# Altium PCB SWDM-21DD8_LV_XX_V1.PcbDoc (part 1 of 2)
Units mil, origin at the board's own origin, x right, y up, seen from the top; angles counter-clockwise.
Board outline 3898.56 x 2933.86 mil, 2 copper layers (Top, Bottom), stack 12.7 mil thick; 138 components, 69 nets, 322 pads, 492 vias.
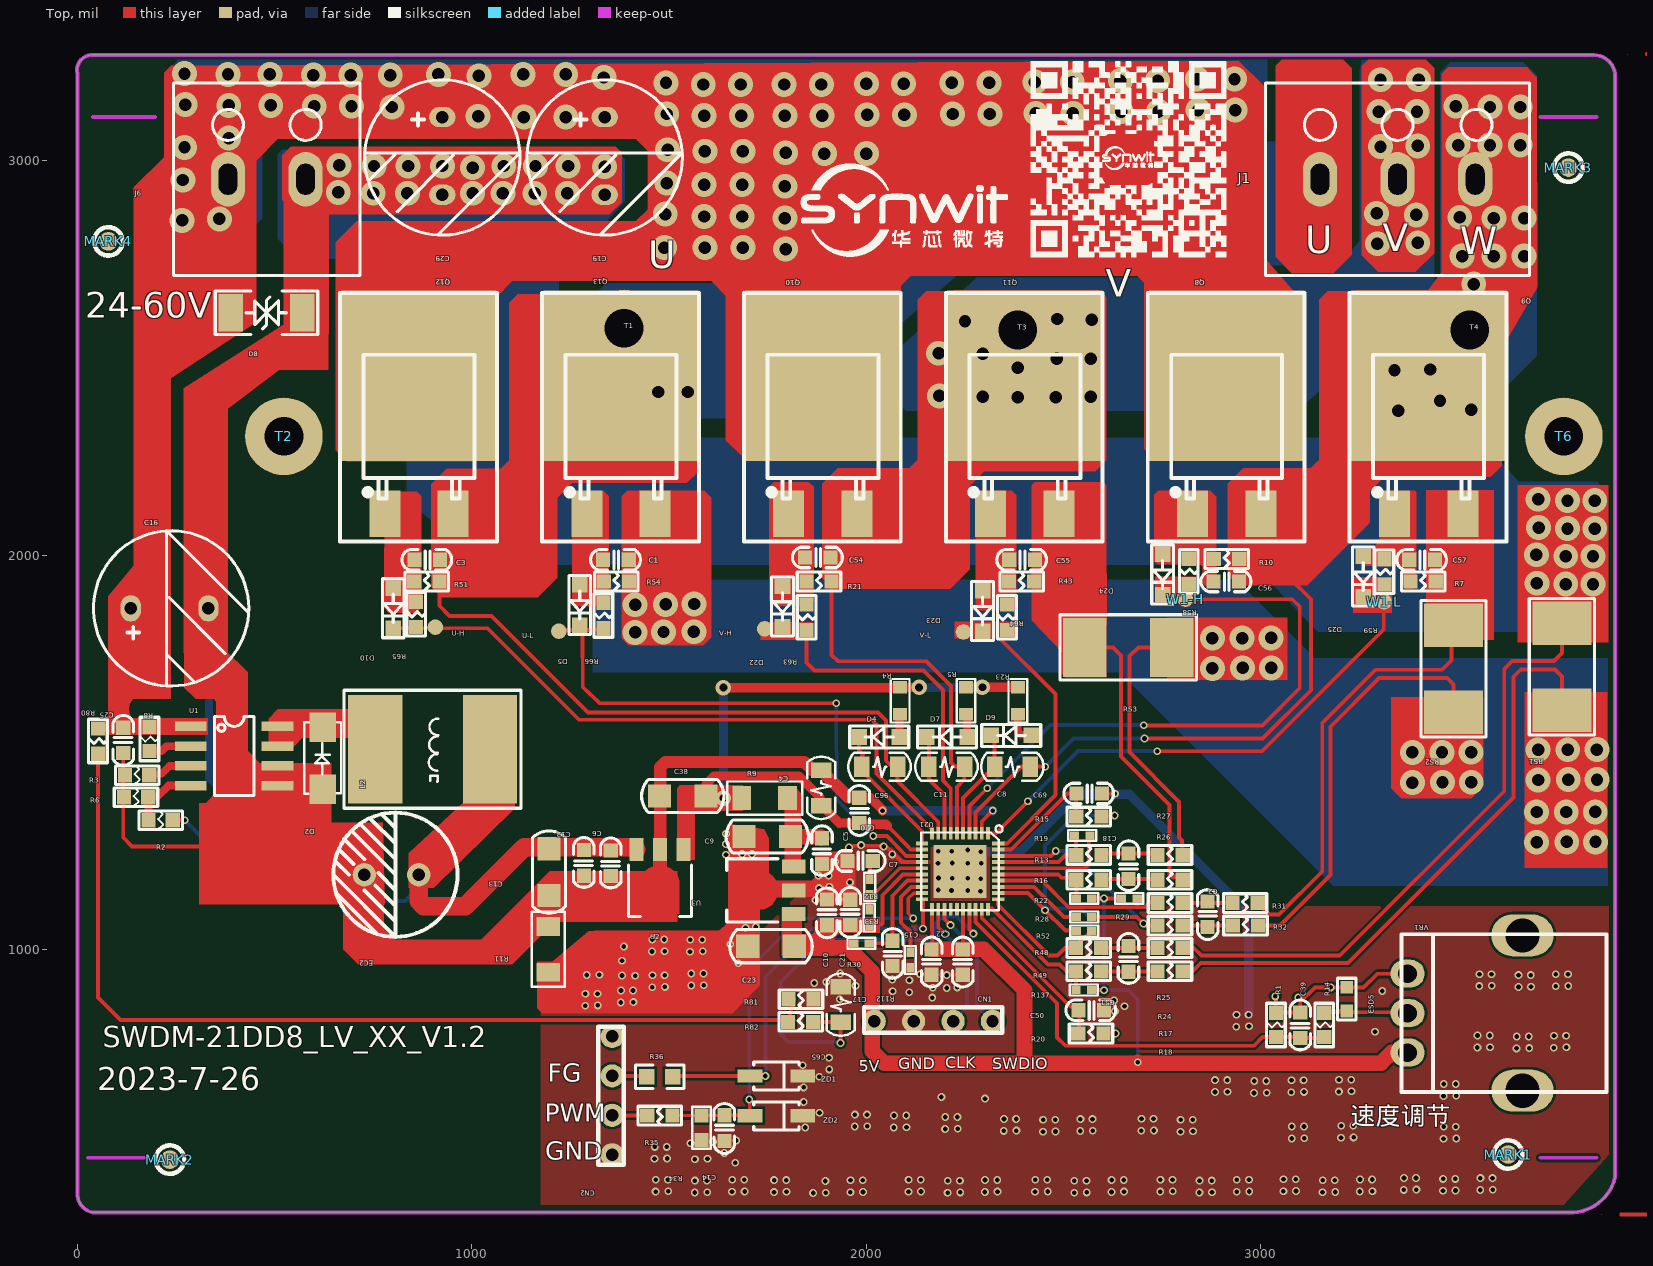
[diagram p0: Top view]
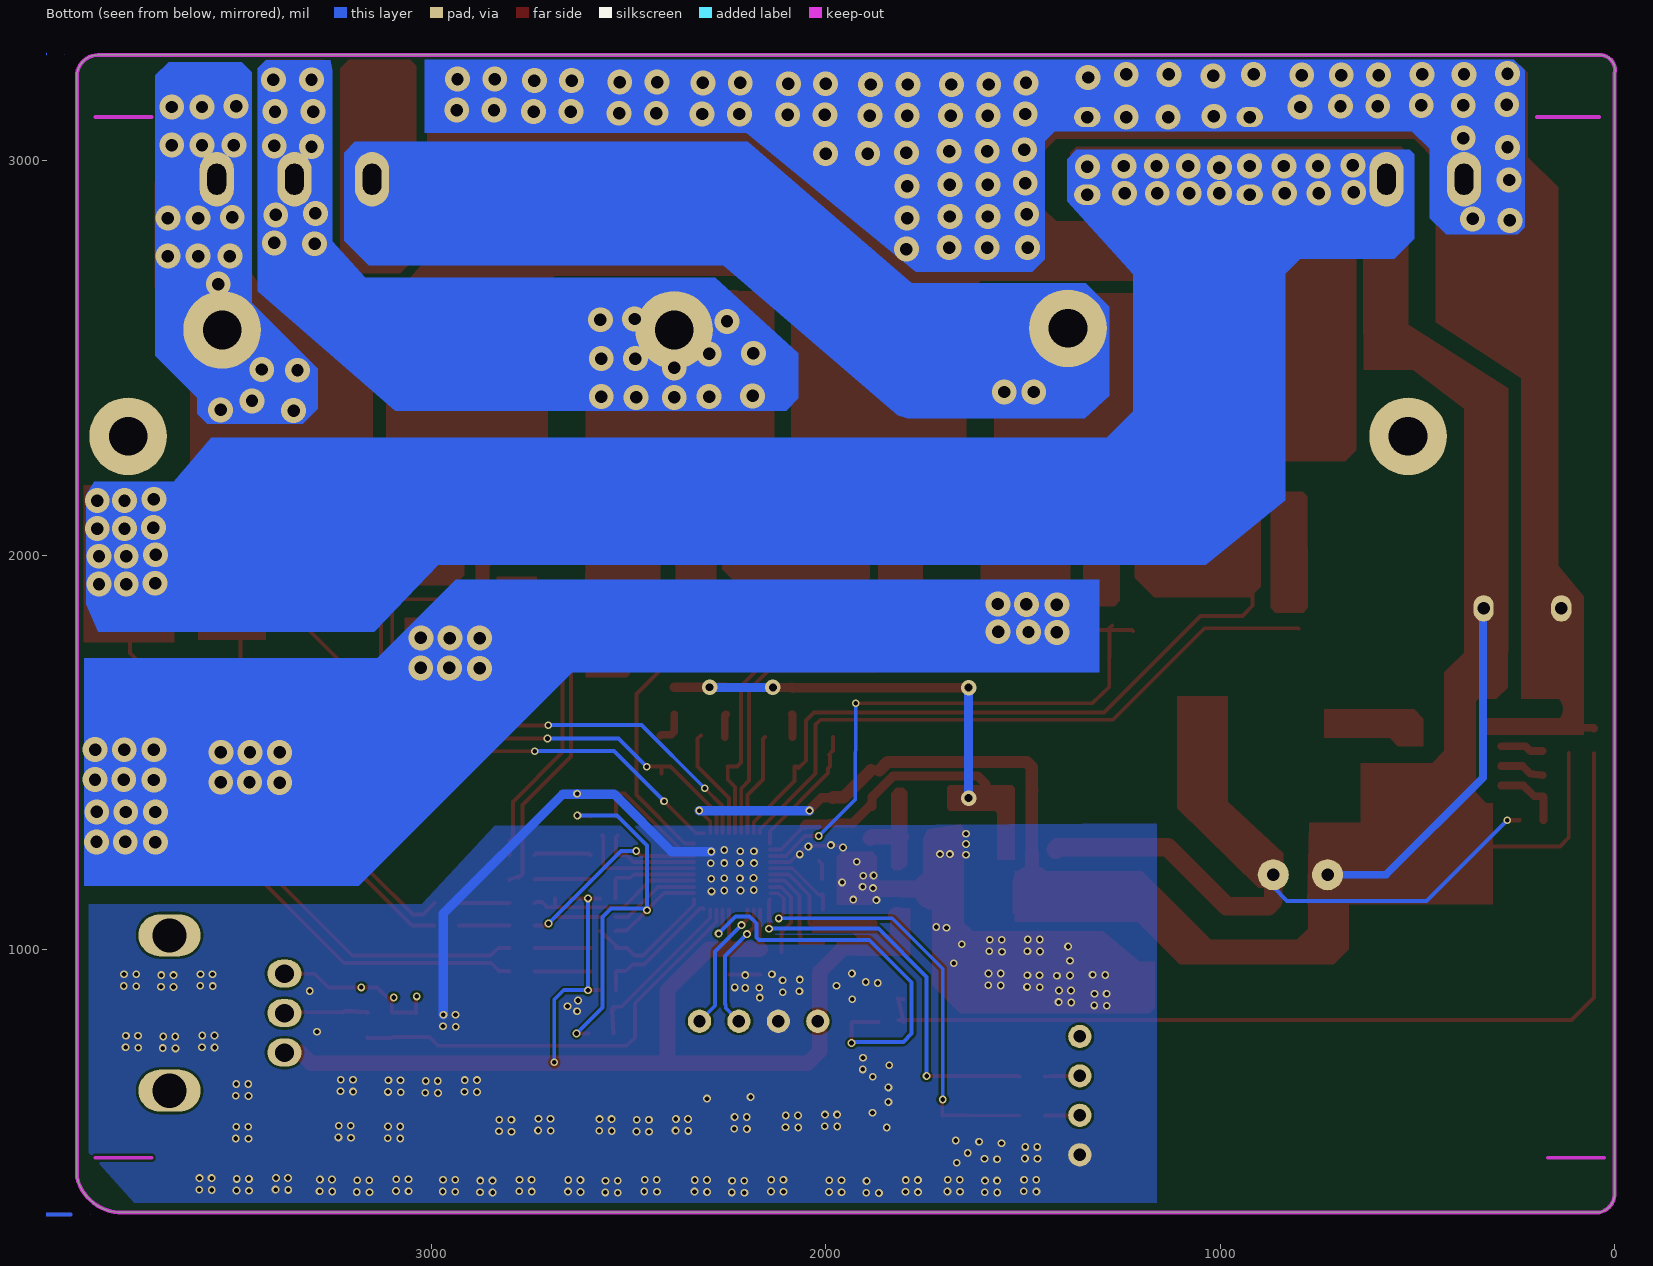
[diagram p1: Bottom view, seen from below]

## Layer stack, top to bottom
Solder Mask Top: solder mask 0.4, Solder Resist, Dk 3.5
Top: signal copper 1.35
Dielectric 1: dielectric 10, FR-4, Dk 4.3
Bottom: signal copper 1.35
Solder Mask Bottom: solder mask 0.4, Solder Resist, Dk 3.5

## Board outline
0,383.86 0,383.83 ccw(c48.6,381.62) 39.37,333.86 3792.99,333.86 ccw(c3784.46,449.99) 3897.64,422.59 3897.64,3220.47 3897.63,3220.5 ccw(c3843.5,3213.09) 3844.49,3267.72 39.37,3267.72 ccw(c37.62,3229.15) 0,3220.47

## Design rules (kind name [scope] priority, off if disabled: settings)
Clearance "Clearance - Default - DEFAULT- SMD" [IsVia vs IsSMTPin] p1: gap=6 ignorepadtopadclearanceinfootprint=FALSE
Clearance "Clearance - Default - DEFAULT - Via" [IsVia vs IsVia] p2: gap=6 ignorepadtopadclearanceinfootprint=FALSE
Clearance "Clearance - Default - DEFAULT - Net" [All] p3: gap=5.91 ignorepadtopadclearanceinfootprint=FALSE except(0: Arc-Hole Track-Hole SMDPad-Hole THPad-Hole Via-Hole Fill-Hole Poly-Hole Region-Hole Text-Hole; 10: Text-Text)
ComponentClearance "ComponentClearance - Default - DEFAULT" [All] p1: gap=5.91 collisioncheckmode=3 verticalgap=10 showdistances=FALSE
FanoutControl Fanout_Small [(CompPinCount < 5)] p3: bgadir=Out bgaviamode=Centered fanoutstyle=Auto fanoutdirection=OutThenIn viagrid=1 // Fanout_Small (Default Rule)
FanoutControl Fanout_SOIC [IsSOIC] p4: bgadir=Out bgaviamode=Centered fanoutstyle=Auto fanoutdirection=Alternating viagrid=1 // Fanout_SOIC (Default Rule)
HoleToHoleClearance "HoleToHoleClearance - Default - DEFAULT" [All] p1: gap=5.91 allowstackedmicrovias=TRUE
Length "Default Length" [All] p1: maxlimit=50000 minlimit=0
MaxMinImpedance "Default Impedance" [All] p1: minimum=50.00 maximum=150.0
ParallelSegment "Default Parallel Segment Adjasent" [All] p1: limit=1000 gap=200
ParallelSegment "Default Parallel Segment Same Layer" [All] p2: limit=1000 gap=200
PlaneConnect "Default PlaneConnect" [All] p1: planeconnectstyle=Direct reliefexpansion=20 reliefentries=4 reliefconductorwidth=15 reliefairgap=10
PolygonConnect "PolygonConnect - Default SMT" [IsSMTPin] p1: connectstyle=Direct reliefconductorwidth=10 reliefentries=4 polygonreliefangle="45 Angle" airgapwidth=10
PolygonConnect "PolygonConnect - Default Pad" [All] p2: connectstyle=Direct reliefconductorwidth=15 reliefentries=4 polygonreliefangle="45 Angle" airgapwidth=10
RoutingLayers "RoutingLayers - Default - DEFAULT" [All] p1: top layer_v5=TRUE bottom layer_v5=TRUE
RoutingPriority "RoutingPriority - Default - DEFAULT" [All] p1: routingpriority=3
RoutingTopology "Default Routing Topology" [All] p1: topology=Shortest
RoutingVias "RoutingVias - Default - DEFAULT" [All] p1: holewidth=11.81 width=19.68 viastyle="Through Hole" minholewidth=11.81 minwidth=19.68 maxholewidth=11.81 maxwidth=19.68
SMDToCorner "SMDToCorner - Default - DEFAULT" [All] p1: distance=60000
SolderMaskExpansion [All] p1: expansion=4 istentingtop=FALSE
Width "Default Width" [All] p1: maxlimit=118.11 minlimit=6 preferedwidth=9.84
22 further rules are at their usual default settings.

## Components (designator, comment, footprint, x,y, rotation, side; value= is the part's Value field where it differs from the comment)
C1 "C0603" C0603 1364.17,1988.19 r180 top (schematic designator R48)
C2 "C0603" C0603 2864.96,1088.98 r270 top (schematic designator C18)
C3 "C0603" C0603 885.83,1988.19 r180 top (schematic designator C25)
C4 "C0805" C0805 1885.43,1409.45 r270 top (schematic designator R36)
C5 "C0603" C0603 1887.4,1250.79 r90 top (schematic designator C38)
C6 "C0603" C0603 1351.97,1219.69 r90 top (schematic designator C55)
C7 "C0603A" C0603A 1984.25,1224.8 r0 top (schematic designator C6)
C8 "C0805" C0805 2370.47,1463.78 r0 top (schematic designator C65)
C9 "C1206" C1206 1748.82,1286.61 r180 top (schematic designator C69)
C10 "C0603" C0603 1900,1093.31 r270 top (schematic designator R82)
C11 "C0805" C0805 2203.54,1463.78 r0 top (schematic designator C1)
C12 "C0603" C0603 1283.86,1220.87 r90 top (schematic designator C10)
C13 "C1206" C1206 1195.67,1196.46 r90 top (schematic designator C11)
C14 "C0603" C0603 1640.16,546.85 r270 top (schematic designator C12)
C15 "C0603A" C0603A 2165.35,968.5 r90 top (schematic designator C13)
C16 "CAP_10X12" CAP_10X12 135.43,1864.96 r0 top (schematic designator C14)
C17 "C0603A" C0603A 2066.54,990.55 r270 top (schematic designator C15)
C18 "C0603" C0603 2664.57,1212.6 r90 top (schematic designator C16)
C19 "CAP_10X12" CAP_10X12 1336.61,3110.24 r270 top (schematic designator C17)
C20 "C0603A" C0603A 1981.89,1352.76 r270 top (schematic designator C19)
C21 "C0603A" C0603A 1959.06,1094.49 r90 top (schematic designator C2)
C22 "C0603A" C0603A 2244.09,968.5 r90 top (schematic designator C20)
C23 "C1206" C1206 1758.27,1008.66 r180 top (schematic designator C21)
C25 "C0603A" C0603A 116.54,1530.31 r90 top (schematic designator C22)
C29 "CAP_10X12" CAP_10X12 925.2,3110.24 r270 top (schematic designator C23)
C38 "C1206" C1206 1534.65,1389.37 r0 top (schematic designator C29)
C39 "C0603" C0603 3099.61,809.06 r90 top (schematic designator C3)
C50 "C0603" C0603 2568.9,846.46 r180 top (schematic designator C39)
C51 "C0603" C0603 2664.57,977.56 r90 top (schematic designator C4)
C54 "C0603" C0603 1875.98,1994.09 r180 top (schematic designator C5)
C55 "C0603" C0603 2393.7,1988.19 r180 top (schematic designator C50)
C56 "C0603" C0603 2911.42,1933.07 r180 top (schematic designator C51)
C57 "C0603" C0603 3407.48,1988.19 r180 top (schematic designator C54)
C65 "C0805" C0805 1935.04,861.02 r90 top (schematic designator C56)
C69 "C0603" C0603 2563.78,1395.67 r180 top (schematic designator C57)
C96 "C0805" C0805 2033.86,1463.78 r0 top (schematic designator C7)
CN1 "4P-2.54-8" 4P-2.54-8 2019.68,818.5 r0 top (schematic designator C8)
CN2 "4P-2.54-8" 4P-2.54-8 1355.51,479.92 r90 top (schematic designator C9)
D2 "SMA" SMA 621.65,1485.43 r90 top (schematic designator CN1)
D4 "SOD-323" SOD-323 2032.68,1538.98 r0 top (schematic designator D23)
D5 "SOD-323" SOD-323 1273.62,1873.23 r90 top (schematic designator D24)
D7 "SOD-323" SOD-323 2204.72,1538.98 r0 top (schematic designator D25)
D8 "Y_SMA-TVS" Y_SMA-TVS 479.53,2614.17 r0 top (schematic designator D4)
D9 "SOD-323" SOD-323 2367.32,1542.91 r0 top (schematic designator D5)
D10 "SOD-323" SOD-323 800.79,1865.35 r90 top (schematic designator C96)
D22 "SOD-323" SOD-323 1787.4,1870.08 r90 top (schematic designator CN2)
D23 "SOD-323" SOD-323 2294.49,1858.27 r90 top (schematic designator D10)
D24 "SOD-323" SOD-323 2750.79,1950.79 r90 top (schematic designator D2)
D25 "SOD-323" SOD-323 3259.45,1945.67 r90 top (schematic designator D22)
EC2 "EC8D-1" EC8D-1 865.35,1189.76 r270 top (schematic designator D7)
ESD5 "ESD0603" ESD0603 3217.72,874.41 r90 top (schematic designator D8)
J1 "3P-5.08" 3P-5.08 3248.03,2952.76 r0 top (schematic designator D9)
J6 "2P-5.08" 2P-5.08 480.32,2952.76 r0 top (schematic designator EC2)
L2 "L-8050" L-8050 900.39,1507.87 r90 top (schematic designator ESD5)
MARK1 "CN3.0" CN3.0 3626.77,480.71 r0 top (schematic designator J1)
MARK2 "CN3.0" CN3.0 234.65,467.72 r0 top (schematic designator J6)
MARK3 "CN3.0" CN3.0 3779.53,2982.28 r0 top (schematic designator L2)
MARK4 "CN3.0" CN3.0 78.74,2795.28 r0 top (schematic designator MARK1)
Q8 "TO-252-2-180" TO-252-2-180 2913.39,2084.65 r90 top (schematic designator Q11)
Q9 "TO-252-2-180" TO-252-2-180 3425.2,2084.65 r90 top (schematic designator Q12)
Q10 "TO-252-2-180" TO-252-2-180 1889.76,2084.65 r90 top (schematic designator MARK2)
Q11 "TO-252-2-180" TO-252-2-180 2401.57,2084.65 r90 top (schematic designator MARK3)
Q12 "TO-252-2-180" TO-252-2-180 866.14,2084.65 r90 top (schematic designator MARK4)
Q13 "TO-252-2-180" TO-252-2-180 1377.95,2084.65 r90 top (schematic designator Q10)
R1 "R0603" R0603 3038.19,809.06 r90 top (schematic designator Q13)
R2 "R0603" R0603 211.02,1327.95 r180 top (schematic designator R17)
R3 "R0603" R0603 151.57,1442.13 r180 top (schematic designator R27)
R4 "0603-R" 0603-R 2085.83,1665.35 r270 top (schematic designator R34)
R5 "0603-R" 0603-R 2252.76,1665.35 r270 top (schematic designator R49)
R6 "R0603" R0603 148.82,1386.22 r180 top (schematic designator R59)
R7 "R0603A$2F$3" R0603A$2F$3 3411.42,1933.07 r180 top (schematic designator R66)
R8 "R0603" R0603 182.68,1533.86 r90 top (schematic designator R7)
R9 "R1206" R1206 1742.13,1384.25 r0 top
R10 "R0603A$2F$3" R0603A$2F$3 2913.39,1990.16 r180 top (schematic designator Q8)
R11 "R1206" R1206 1193.7,1000.79 r270 top (schematic designator Q9)
R12 "0402" 0402 2008.66,1159.06 r270 top (schematic designator R10)
R13 "R0603A$2F$3" R0603A$2F$3 2563.78,1240.16 r180 top (schematic designator R11)
R14 "R0603" R0603 3160.63,809.06 r90 top (schematic designator R12)
R15 "R0603A$2F$3" R0603A$2F$3 2563.78,1337.4 r180 top (schematic designator R13)
R16 "R0603A$2F$3" R0603A$2F$3 2563.78,1177.17 r180 top (schematic designator R137)
R17 "R0603A$2F$3" R0603A$2F$3 2769.68,1003.94 r180 top (schematic designator R14)
R18 "R0603A$2F$3" R0603A$2F$3 2769.68,944.88 r180 top (schematic designator R15)
R19 "0402" 0402 2547.24,1289.37 r180 top (schematic designator R16)
R20 "R0603A$2F$3" R0603A$2F$3 2569.29,787.4 r180 top (schematic designator R18)
R21 "R0603A$2F$3" R0603A$2F$3 1879.92,1933.07 r180 top (schematic designator R19)
R22 "0402" 0402 2551.97,1129.92 r0 top (schematic designator R2)
R23 "0603-R" 0603-R 2383.86,1665.35 r270 top (schematic designator R20)
R24 "R0603A$2F$3" R0603A$2F$3 2769.68,1061.02 r180 top (schematic designator R21)
R25 "R0603A$2F$3" R0603A$2F$3 2769.68,1118.11 r180 top (schematic designator R22)
R26 "R0603A$2F$3" R0603A$2F$3 2769.68,1177.17 r180 top (schematic designator R23)
R27 "R0603A$2F$3" R0603A$2F$3 2769.68,1240.16 r180 top (schematic designator R24)
R28 "0402" 0402 2551.97,1082.68 r0 top (schematic designator R25)
R29 "0402" 0402 2666.54,1129.92 r180 top (schematic designator R26)
R30 "0402" 0402 1987.4,1016.14 r0 top (schematic designator R28)
R31 "R0603A$2F$3" R0603A$2F$3 2959.84,1118.11 r180 top (schematic designator R29)
R32 "R0603A$2F$3" R0603A$2F$3 2961.02,1061.02 r180 top (schematic designator R3)
R33 "0402" 0402 2007.09,1081.5 r90 top (schematic designator R30)
R34 "2512R-X" 2512R-X 1581.89,548.43 r270 top (schematic designator R31)
R35 "R0603A" R0603A 1476.38,579.53 r0 top (schematic designator R32)
R36 "R0603-X" R0603-X 1476.38,677.95 r180 top (schematic designator R33)
R43 "R0603A$2F$3" R0603A$2F$3 2393.7,1933.07 r180 top (schematic designator R35)
R48 "R0603A$2F$3" R0603A$2F$3 2563.39,1003.94 r180 top (schematic designator R4)
R49 "R0603A$2F$3" R0603A$2F$3 2563.39,944.88 r180 top (schematic designator R43)
R51 "R0603A$2F$3" R0603A$2F$3 885.83,1933.07 r180 top (schematic designator R5)
R52 "0402" 0402 2551.97,1047.24 r0 top (schematic designator R51)
R54 "R0603A$2F$3" R0603A$2F$3 1366.14,1933.07 r180 top (schematic designator R52)
R58 "R0603A$2F$3" R0603A$2F$3 2816.93,1958.66 r90 top (schematic designator R54)
R59 "R0603A$2F$3" R0603A$2F$3 3312.99,1957.48 r90 top (schematic designator R58)
R63 "R0603A$2F$3" R0603A$2F$3 1848.43,1842.52 r90 top (schematic designator R6)
R64 "R0603A$2F$3" R0603A$2F$3 2356.3,1842.52 r90 top (schematic designator R63)
R65 "R0603A$2F$3" R0603A$2F$3 858.66,1850 r90 top (schematic designator R64)
R66 "R0603A$2F$3" R0603A$2F$3 1333.46,1846.85 r90 top (schematic designator R65)
R80 "R0603A$2F$3" R0603A$2F$3 52.36,1528.74 r90 top (schematic designator R8)
R81 "R0603A$2F$3" R0603A$2F$3 1834.25,874.02 r0 top (schematic designator R80)
R82 "R0603A$2F$3" R0603A$2F$3 1833.46,816.93 r180 top (schematic designator R81)
R112 "0402" 0402 2111.42,973.62 r270 top (schematic designator R1)
R137 "0402" 0402 2551.18,897.64 r0 top (schematic designator R112)
RS1 "2512R_6332" 2512R_6332 3762.99,1716.93 r270 top
RS2 "2512R_6332" 2512R_6332 3488.19,1712.2 r90 top
RS3 "2512R_6332" 2512R_6332 2663.78,1766.14 r180 top
T1 "TEST" TEST 1385.83,2574.8 r0 top (schematic designator SYNWIT_GD_CODE1)
T2 "TEST" TEST 523.62,2301.18 r0 top (schematic designator SYNWIT_LOGO1)
T3 "TEST" TEST 2383.86,2570.87 r0 top (schematic designator SYNWIT_QQ1)
T4 "TEST" TEST 3529.53,2570.87 r0 top (schematic designator T1)
T6 "TEST" TEST 3767.72,2301.18 r0 top (schematic designator T2)
U1 "SOP8" SOP8 287.4,1565.75 r0 top (schematic designator T3)
U2 "78L05" 78L05 1537.01,1253.94 r180 top (schematic designator T4)
U3 "78L05" 78L05 1816.14,1090.16 r90 top (schematic designator U)
U21 "QFN40" QFN40 2237.4,1198.43 r270 top (schematic designator T6)
U-H "TP80" TP80 907.48,1817.32 r0 top (schematic designator U)
U-L "TP80" TP80 1220.47,1807.09 r0 top (schematic designator U1)
V-H "TP80" TP80 1742.13,1812.99 r0 top (schematic designator U2)
V-L "TP80" TP80 2246.06,1805.12 r0 top (schematic designator U21)
VR1 "VR6" VR6 3371.65,738.98 r90 top (schematic designator U3)
W1-H "TP80" TP80 2808.66,1888.19 r0 top (schematic designator V)
W1-L "TP80" TP80 3312.2,1881.89 r0 top (schematic designator V)
ZD1 "SOD-123" SOD-123 1771.65,679.53 r180 top (schematic designator VR1)
ZD2 "SOD-123" SOD-123 1771.65,578.74 r180 top (schematic designator W1)

## Footprints (in the part's own frame and the unit in brackets; to place one, negate y for a bottom-side part, rotate by r counter-clockwise, add the part's x,y. Pads: shape width x height; smd on the part's side, far side on the other; paste and mask are expansions set on the pad)
2P-5.08 [mm]
  oval 2.2x3.5 hole 1.2 slot 2 at 90 deg: 1(-2.5,0) 2(2.5,0)
  silkscreen extent -6,-6.2 6,6.2
3P-5.08 [mm]
  oval 2.2x3.5 hole 1.2 slot 2 at 90 deg: 1(-2.5,0) 2(2.5,0) 3(7.5,0)
  silkscreen extent -6,-6.2 11,6.2
4P-2.54-8 [mm]
  round 1.5 hole 0.8: 1(0,0) 2(2.54,0) 3(5.08,0) 4(7.62,0)
  silkscreen extent -0.65,-0.75 8.25,0.9
78L05 [mm]
  rect 0.9x1.5 smd: 1(0,0) 2(1.524,0) 3(3.048,0)
  Top region: 2.74,4.13 0.3,4.13 0.299,2.02 0.313,1.916 0.428,1.637 0.612,1.397 0.852,1.213 1.088,1.116 1.09,1.12 1.09,0.12 1.96,0.12 1.961,1.104 1.985,1.107 2.236,1.211 2.452,1.377 2.618,1.593 2.722,1.844 2.74,1.979 2.74,1.98
  silkscreen extent -0.51,1.02 3.56,4.32
0402 [mm]
  rect 0.6x0.5 smd: 1(-0.5,0) 2(0.5,0)
  silkscreen extent -0.9,-0.35 0.9,0.35
0603-R [mm]
  rect 0.799x0.9 smd: 1(0,0) 2(1.751,0)
  silkscreen extent -0.52,-0.6 2.27,0.6
2512R-X [mm]
  rect 0.9x0.9 smd: 1(-0.8,0) 2(0.8,0)
  silkscreen extent -1.35,-0.6 1.35,0.6
2512R_6332 [mm]
  rect 2.8x3.8 smd: 1(-2.8,0) 2(2.8,0)
  silkscreen extent -4.4,-2.1 4.4,2.1
C0603 [mm]
  rect 0.91x0.91 smd: 1(-0.85,0) 2(0.8,0)
  silkscreen extent -1.6,-0.66 1.61,0.66
C0603A [mil]
  rect 36x36 smd: 1(-32,0) 2(32,0)
  silkscreen extent -63,-26 63,26
C0805 [mm]
  rect 1x1.3 smd: 1(-1.15,0) 2(1.15,0)
  silkscreen extent -2.02,-0.9 2,0.9
C1206 [mm]
  rect 1.5x1.5 smd mask+0.051: 1(1.5,0) 2(-1.5,0)
  silkscreen extent -2.65,-1.07 2.65,1.07
CAP_10X12 [mm]
  oval 1.3x1.7 hole 0.8: 1(0,0) 2(5,0)
  silkscreen extent -2.4,-5 7.6,5
CN3.0 [mm]
  round 1.2 smd: 1(0,0)
  silkscreen extent -0.91,-0.91 0.92,0.91
EC8D-1 [mm]
  round 1.5 / inner round 1.5 / far side round 2 hole 0.8: 1(0,0) 2(0,-3.5)
  silkscreen extent -4,-5.5 4,2.5
ESD0603 [mil]
  rrect0% 32x32 smd: 1(-30,0) 2(30,0)
  silkscreen extent -53,-24 53,24
L-8050 [mm]
  rect 7x3.5 smd: 1(0,-3.7) 2(0,3.7)
  silkscreen extent -3.8,-5.7 3.8,5.7
QFN40 [mm]
  rect 0.8x0.25 smd: 1(-2.45,1.8) 2(-2.45,1.4) 3(-2.45,1) 4(-2.45,0.6) 5(-2.45,0.2) 6(-2.45,-0.2) 7(-2.45,-0.6) 8(-2.45,-1) 9(-2.45,-1.4) 10(-2.45,-1.8) 21(2.45,-1.8) 22(2.45,-1.4) 23(2.45,-1) 24(2.45,-0.6) 25(2.45,-0.2) 26(2.45,0.2) 27(2.45,0.6) 28(2.45,1) 29(2.45,1.4) 30(2.45,1.8)
  rect 0.25x0.8 smd: 11(-1.8,-2.45) 12(-1.4,-2.45) 13(-1,-2.45) 14(-0.6,-2.45) 15(-0.2,-2.45) 16(0.2,-2.45) 17(0.6,-2.45) 18(1,-2.45) 19(1.4,-2.45) 20(1.8,-2.45) 31(1.8,2.45) 32(1.4,2.45) 33(1,2.45) 34(0.6,2.45) 35(0.2,2.45) 36(-0.2,2.45) 37(-0.6,2.45) 38(-1,2.45) 39(-1.4,2.45) 40(-1.8,2.45)
  rrect0% 3.4x3.4 smd: 41(0,0)
  silkscreen extent -2.96,-2.5 2.5,2.74
R0603 [mil]
  rect 36x36 smd: 1(-30.71,0) 2(30.71,0)
  silkscreen extent -55,-24 55,24
R0603-X [mm]
  rect 1x1 smd: 1(-0.83,0) 2(0.83,0)
  silkscreen extent -1.56,-0.76 1.56,0.76
R0603A [mil]
  rrect0% 36x36 smd: 1(-32,0) 2(32,0)
  silkscreen extent -55,-24 55,24
R0603A$2F$3 [mil]
  rrect0% 36x36 smd: 1(-32,0) 2(32,0)
  silkscreen extent -55,-24 55,24
R1206 [mil]
  rect 47.24x60 smd mask+2: 1(-58,0) 2(58,0)
  silkscreen extent -95,-42 95,42
SMA [mm]
  rect 1.9x1.7 smd: 1(2,0) 2(-2,0)
  silkscreen extent -2.3,-1.19 2.3,1.18
SOD-123 [mm]
  rect 1.6x0.85 smd: 1(-1.7,0) 2(1.7,0)
  silkscreen extent -1.45,-0.9 1.45,0.9
SOD-323 [mm]
  rrect0% 1x1 smd: 1(1.3,0) 2(-1.3,0)
  silkscreen extent -1.9,-0.7 1.9,0.7
SOP8 [mil]
  rect 80x24 smd: 1(0,0) 2(0,-50) 3(0,-100) 4(0,-150) 5(220,-150) 6(220,-100) 7(220,-50) 8(220,0)
  silkscreen extent 60,-175 160,25
TEST [mm]
  round 5 hole 2.5: 1(0,0)
TO-252-2-180 [mm]
  rect 3x2 smd: 1(0.5,2.2) 3(0.5,-2.2)
  rect 11x10 smd: 2(9.4,0)
  silkscreen extent -1.27,-5.01 14.73,5.09
TP80 [mm]
  round 1 smd: 1(0,0)
VR6 [mm]
  oval 1.8x2.2 hole 1.2: 1(0,0) 3(5.08,0) W(2.54,0)
  oval 2.7x4 hole 2.2: 4(7.55,-7.4) 5(-2.45,-7.4)
  silkscreen extent -2.54,-12.81 7.62,0.4
Y_SMA-TVS [mm]
  rect 1.6x2.4 smd: 1(-2.3,0) 2(2.3,0)
  silkscreen extent -3.3,-1.4 3.3,1.4

## Part data
C1 C10 R2 R3 R5 R6 R7 R8 R12 R15 R18 R19 R20 R23 R24 R27 R28 R29 R34 R35 R49 R52 R58 R59 R64 R65 R66 R81 R82: library part RES_SEMI, "Semiconductor Resistor"
C3 C17 C19 C22 C23 C25 C96: library part CAP_S
C4: library part RES2
C5 C15: library part C1206, "电解电容"
C6 C39 C55 C57 C69: "贴片瓷片电容"
C7 C21: library part C0603
C8: library part CAP, "Capacitor"
C9 C11 C65: library part C0603, "贴片瓷片电容"
C12 C54: library part CAP_2, "贴片瓷片电容"
C13 CN1 D10: library part C0805
C16: library part C0603, "Capacitor"
C18 C20 C38: library part CAP_10X12
C29 CN2: library part C1206, "Capacitor"
C51: library part C0805, "SMT Resistor 5% UniOhm(厚声)"
D2 D22: library part 4P-2.54-8, "接插件  DS-5.1CN4  DS-2.54CWB-4"
D4 D5 D7 D8 D9 D23 D25 EC2 J1: library part DIODE, "Default Diode"
D24: library part DIODE_2
ESD5: library part DIODE_4
J6: library part CAP_POL2, "Polarized Capacitor (Axial)"
L2: library part ESD0603
MARK1: library part 3P-5.08
MARK2: library part 2P-5.08
MARK3: library part L-8050
MARK4 Q10 Q11 Q12: library part TEST_POINT
Q8 Q9 Q13 R1 R10 R11: library part AO3400A_NZKDZ_X0YV1T_SOT-23, "MOS(场效应管)"
R4: library part RES, "电阻, Resistor"
R9: "贴片 电阻器"
R13: library part R1206, "贴片 电阻器"
R14 R16 R21 R25 R30 R31 R33 R36 R54 R137: library part R0402, "贴片电阻"
R17 R112: library part 10K_2
R22 R32 R63 R80: library part R0603
R26 R48 R51: library part RES_T
R43: library part 0603_1KKC_(1001)_1%, "贴片电阻"
RS1 RS2 RS3: library part RES_2512, "Semiconductor Resistor"
T1 T2 T3: library part SYNWIT_LOGO
U1 U2 U21: library part TEST
U3 U-H W1-H W1-L ZD2: library part TP_1
U-L: library part TX4144
V-H VR1: library part 78L05
V-L: library part QFN40
ZD1: library part RV-3296, "Potentiometer"

## Via types
v1: diameter 19.68, hole 11.81, Top to Bottom, 314 vias
v2: diameter 62.99, hole 31.5, Top to Bottom, 174 vias
v3: diameter 39.37, hole 19.68, Top to Bottom, 4 vias

## Nets (pads, with @x,y where several pads share a name; then routed paths per layer and width w, separated by ;. In a path a pad name is that pad's centre, name@x,y a point inside that pad or via, vN(x,y) a via of type N, cw(c..) or ccw(c..) an arc to the next point about the centre after c; other vN are vias at no path point)
5V: C10.2 C15.2 C21.1 C22.2 C23.2 CN1.1 R22.2 R29.2 R30.1 R33.1 R137.2 U3.1 U21.16 U21.21 U21.26 VR1.1 | length 3451.8
  Top w9.84: C23.2@1817.32,1008.66 1809.45,1008.27 C23.2@1817.72,1008.27 ; 1964.76,994.29 1964.76,1013.19 R30.1@1967.72,1016.14 ; R33.1@2007.09,1061.81 2010.24,1061.81 2011.81,1063.39 2038.19,1063.39 2040.55,1065.75 2040.55,1137.8 2093.31,1190.55 U21.16@2140.94,1190.55 ; C15.2@2165.35,1000.5 2166.93,1004.45 2166.93,1048.43 2166.54,1048.82 U21.21@2166.54,1101.97 ; C22.2@2244.09,1000.5 2245.28,1000.5 U21.26@2245.28,1101.97 ; R137.2@2570.87,897.64 2601.97,897.64 v1(2602.36,897.24) ; R22.2@2571.65,1129.92 v1(2602.36,1129.92) R29.2@2646.85,1129.92
  Top w23.62: C23.2@1817.32,1008.66 1817.72,1009.06 C23.2@1821.54,1012.87 ; C10.2@1900,1061.81 C10.2@1900.39,1061.42
  Top w39.37: U3.1@1821.77,1088.19 1817.72,1088.19 1817.72,1009.06 1817.72,1008.27 1817.72,1004.33 1954.72,1004.33 1964.76,994.29 2014.57,944.49 2014.57,882.68 CN1.1@2014.57,818.9 ; CN1.1@2019.68,818.5 2019.29,818.9 CN1.1@2014.57,818.9 ; C15.2@2165.35,1000.5 C22.2@2244.09,1000.5 ; C22.2@2245.28,1000.5 2297.53,1000.5 2400.79,897.24 2400.79,712.6 ; v1(2687.8,714.57) v1@2687.8,712.6 ; VR1.1@3371.65,738.98 3370.87,739.76 3331.89,739.76 3304.72,712.6 v1@2687.8,712.6 ; CN1.1@2014.57,818.9 2014.57,742.91 2044.88,712.6 2400.79,712.6 ; 2400.79,712.6 v1@2687.8,712.6
  Bottom w9.84: v1(2602.36,1129.92) v1(2602.36,897.24) 2663.78,897.24 2687.8,873.23 v1(2687.8,714.57) ; VR1.1@3371.65,738.98 VR1.1@3383.86,726.77
12V: C4.2 C20.2 C38.1 R4.1 R5.1 R9.1 R23.1 U2.1 U21.12 | length 1819.9
  Top w9.84: 2052.56,1314.76 2068.03,1299.29 2068.03,1299.15 2102.86,1263.82 2112.27,1254.41 2112.27,1253.54 U21.12@2140.94,1253.54
  Top w23.62: v3(1637.8,1384.25) 1633.86,1389.37 C38.1@1593.7,1389.37 1593.7,1419.29 1614.57,1440.16 1828.74,1440.16 1882.48,1386.42 C4.2@1882.48,1364.57 ; v3(1637.8,1664.17) R4.1@2081.26,1664.17 ; C4.2@1882.48,1362.8 C4.2@1882.48,1364.57 ; 2052.56,1314.76 2049.64,1317.68 2002.18,1317.68 C20.2@1981.89,1320.76 1932.57,1320.76 1932.09,1320.28 1887.81,1364.57 C4.2@1882.48,1364.57 ; R4.1@2081.79,1664.17 R4.1@2081.26,1664.17 ; R4.1@2085.83,1665.35 R4.1@2084.97,1664.57 ; v3(2133.46,1664.57) R4.1@2084.97,1664.57 ; R5.1@2252.76,1665.35 2281.5,1665.35 v3(2294.09,1664.96) 2283.86,1665.35 R23.1@2383.86,1665.35 ; R4.1@2081.26,1664.17 2083.11,1662.85 R4.1@2084.97,1664.57 ; R4.1@2081.26,1664.17 2080.71,1664.57 R4.1@2084.97,1664.57
  Bottom w23.62: v3(1637.8,1384.25) v3(1637.8,1664.17) ; v3(2133.46,1664.57) v3(2294.09,1664.96)
15V: C6.2 C12.2 C13.1 EC2.1 L2.1 R2.1 U2.3 | length 1442.1
  Top w10.24: R2.1@241.73,1327.95 v1(272.05,1327.95)
  Top w47.24: EC2.1@865.35,1189.76 865.35,1123.23 878.35,1110.24 983.46,1110.24 1132.68,1259.45 1411.5,1259.45 U2.3@1417.01,1253.94
  Bottom w10.24: v1(272.05,1327.95) 476.77,1123.23 830.32,1123.23 865.35,1158.27 EC2.1@865.35,1189.76
$$$1: 
$$$2: 
$$$5: C57.2 D25.1 Q9.1 R7.2 R59.2
$$$6: C54.2 D22.1 Q10.1 R21.2 R63.2
$$$7: C55.2 D23.1 Q11.1 R43.2 R64.2
$$$8: C3.2 D10.1 Q12.1 R51.2 R65.2
$$$9: C1.2 D5.1 Q13.1 R54.2 R66.2
$$$3156: R80.1 R81.1 R82.2 | length 2493.9
  Top w10.24: R80.1@52.36,1496.74 52.36,878.35 109.45,821.26 R82.2@1802.6,821.26 ; R81.1@1802.25,874.02 1816.82,875.59 1815.5,870.55 R82.2@1802.6,821.26 ; R82.2@1802.6,821.26 R82.2@1801.46,816.93 1814.85,821.26 R82.2@1802.6,821.26
$$$4915: C39.2 ESD5.2 R1.2 VR1.3 | length 462.8
  Top w9.84: v1(3036.22,881.5) 3038.19,879.53 R1.2@3038.19,839.76 3038.98,840.55 C39.2@3099.61,840.55 3099.61,866.96 ; v1(3094.88,878.74) 3099.61,874.02 3099.61,866.96 ; v1(3176.77,904.33) 3192.91,904.36 ; VR1.3@3371.65,938.98 3295.28,938.98 3260.24,903.94 3259.76,904.41 ESD5.2@3217.72,904.41 3192.91,904.36 ; 3099.61,866.96 3137.01,904.36 3192.91,904.36
$$$5268: C7.2 R12.1 | length 49.2
  Top w10.24: R12.1@2008.66,1178.74 2008.66,1217.21 C7.2@2016.25,1224.8
$$$5379: D9.1 R23.2 | length 82.4
  Top w19.68: R23.2@2383.86,1596.43 2383.86,1552.76 2391.73,1544.88 2416.54,1544.88 D9.1@2418.5,1542.91
$$$5522: C18.1 R16.1 R26.2 | length 143.5
  Top w9.84: R16.1@2595.78,1177.17 2597.75,1179.13 C18.1@2664.57,1179.13 2735.72,1179.13 R26.2@2737.68,1177.17
$$$5523: C18.2 R13.1 R27.2 | length 145.2
  Top w9.84: R13.1@2595.78,1240.16 2599.72,1244.09 2733.75,1244.09 R27.2@2737.68,1240.16
$$$5560: D4.1 R4.2 | length 59.1
  Top w19.68: D4.1@2083.86,1538.98 2083.86,1596.03 R4.2@2085.83,1596.43
$$$5561: D7.1 R5.2 | length 58.8
  Top w19.68: R5.2@2252.76,1596.43 2255.91,1593.28 D7.1@2255.91,1538.98
$$$5628: C2.1 R25.1 R31.2 | length 126.2
  Top w9.84: R25.1@2801.69,1118.11 R31.2@2927.84,1118.11
$$$5629: C2.2 R24.1 R32.2 | length 127.3
  Top w9.84: R24.1@2801.69,1061.02 R32.2@2929.02,1061.02
$$$5751: R112.1 U21.18 | length 213.4
  Top w9.84: R112.1@2111.42,993.31 2111.42,1044.88 2088.19,1068.11 2088.19,1133.86 2113.39,1159.06 U21.18@2140.94,1159.06
$$$11024: C5.2 C9.2 R9.2 U3.3 | length 81.3
  Top w39.37: C9.2@1807.87,1286.61 1883.07,1286.61 C5.2@1887.4,1282.28
$$$14301: D2.1 L2.2 U1.7 U1.8
$$$16311: R2.2 R6.1 U1.4 | length 178.7
  Top w19.68: R2.2@180.31,1327.95 180.32,1385.43 R6.1@179.53,1386.22 181.89,1388.58 203.94,1388.58 231.1,1415.75 U1.4@287.4,1415.75
$$$16791: R8.1 U1.2 | length 109.9
  Top w19.68: R8.1@182.68,1503.15 213.39,1503.15 225.98,1515.75 U1.2@287.4,1515.75
$$$17024: R3.1 U1.3 | length 113.5
  Top w19.68: R3.1@182.28,1442.13 214.17,1446.06 233.86,1465.75 U1.3@287.4,1465.75
$$$26259: C51.1 R18.2 R49.1 | length 142.3
  Top w9.84: R49.1@2595.39,944.88 R18.2@2737.68,944.88
$$$26262: C51.2 R17.2 R48.1 | length 142.3
  Top w9.84: R48.1@2595.39,1003.94 R17.2@2737.68,1003.94
$$$28194: C56.2 D24.1 Q8.1 R10.2 R58.2
$$$31867: ESD5.1 R14.2 VR1.W | length 213.3
  Top w9.84: ESD5.1@3225.59,841.42 3369.21,841.42 VR1.W@3371.65,838.98
  Top w11.81: R14.2@3160.63,839.76 3162.28,841.42 ESD5.1@3217.72,844.41 ESD5.1@3225.59,841.42
A-GND: C4.1 C6.1 C12.1 C13.2 C16.2 C19.2 C20.1 C25.1 C29.2 C38.2 D2.2 D8.2 EC2.2 J6.2 R3.2 R6.2 R11.1 R17.1 RS1.1 U1.5 U1.6 U2.2 U21.2 | length 5047.6
  Top w9.84: C25.1@116.54,1498.31 116.54,1284.25 138.98,1261.81 363.39,1261.81 405.91,1304.33 405.91,1415.35 ; R11.1@1193.7,1058.79 C13.2@1193.7,1135.43 ; C38.2@1475.59,1389.37 C38.2@1475.68,1386.28 ; C38.2@1475.68,1403.54 C38.2@1475.68,1386.28 ; C4.1@1863.78,1454.72 C4.1@1885.43,1454.72 ; U21.2@2292.52,1294.88 2292.52,1324.8 v1(2320.08,1352.36) ; R17.1@2801.69,1003.94 2829.92,1003.94 2849.21,984.65 3200,984.65 3616.93,1401.57 3616.93,1711.42 3637.01,1731.5 3742.52,1731.5 3762.99,1751.97 RS1.1@3762.99,1827.17 ; C13.2@1193.7,1135.43 C13.2@1195.67,1137.4 ; C13.2@1193.7,1135.43 C13.2@1195.67,1137.4 ; C13.2@1195.67,1137.4 1202.76,1144.49 1441.73,1144.49 1477.95,1180.71 1477.95,1310.63 1477.01,1341.9 1477.01,1342.13 C38.2@1475.68,1386.28
  Top w23.62: C20.1@1981.89,1384.76 2010.63,1384.76 2040.94,1354.44 v1(2040.94,1352.36)
  Top w31.5: C38.2@1475.68,1403.54 1477.01,1402.22 1477.01,1342.13 U2.2@1477.01,1253.94 ; 1477.01,1341.9 1477.01,1462.2 1490.4,1475.59 1842.91,1475.59 C4.1@1863.78,1454.72 ; C4.1@1885.43,1454.72 1953.54,1386.61 1980.03,1386.61 C20.1@1981.89,1384.76
  Bottom w9.84: 836.61,2880.71 v2(836.61,2917.32) ; C29.2@925.2,2913.39 930.71,2907.87 930.71,2869.96 936.79,2869.96
  Bottom w19.68: C16.2@332.28,1864.96 333.86,1863.39 333.86,1435.83 579.92,1189.76 EC2.2@727.56,1189.76
  Bottom w23.62: v1(2040.94,1352.36) v1(2320.08,1352.36)
  other v2: 3772.83,1926.38 3841.73,1926.38 3699.61,1928.74 3772.83,1997.24 3841.73,1997.24 3698.43,2000.79 3777.17,2067.32 3846.06,2067.32 3703.94,2069.69 3777.17,2138.19 3846.06,2138.19 3702.76,2141.73 750,2917.32 1001.97,2917.32 1078.74,2917.32 1159.45,2917.32 1242.13,2917.32 661.42,2919.29 1001.97,2982.28 1336.61,2984.25 751.97,2986.22 838.58,2986.22 925.2,2986.22 1080.71,2986.22 1161.42,2986.22 1244.09,2986.22 663.39,2988.19
CAP: R12.2 R33.2 U21.15 | length 199.2
  Top w9.84: R12.2@2008.66,1139.37 2009.06,1138.98 2017.32,1138.98 2084.65,1206.3 U21.15@2140.94,1206.3
  Top w10.24: R33.2@2007.09,1101.18 2007.09,1137.8 R12.2@2008.66,1139.37
COM: C1.1 Q13.3 R18.1 R27.1 R32.1 R54.1 RS1.2 RS2.1 RS3.1 | length 3277.5
  Top w9.84: 2792.52,1283.86 2799.72,1276.66 R27.1@2801.69,1240.16 ; R18.1@2801.69,944.88 2802.47,945.67 2827.56,945.67 2847.64,965.75 3220.87,965.75 3640.55,1385.43 3640.55,1691.73 3658.66,1709.84 3745.28,1709.84 3762.99,1692.13 RS1.2@3762.99,1606.69 ; R32.1@2993.02,1061.02 3034.25,1061.02 3034.65,1061.42 3048.43,1061.42 3175.98,1188.98 3175.98,1564.96 3299.21,1688.19 3472.44,1688.19 3488.19,1672.44 RS2.1@3488.19,1601.97
  Top w10.24: RS3.1@2774.02,1766.14 2689.37,1766.14 2666.93,1743.7 2666.93,1500.39 2792.52,1374.8 2792.52,1283.86
  other v2: 3698.82,1272.05 3775.2,1273.23 3848.03,1273.23 3698.82,1348.82 3774.02,1348.82 3847.64,1349.21 3383.86,1423.23 3460.24,1424.41 3533.07,1424.41 3702.76,1429.92 3779.13,1431.1 3851.97,1431.1 3383.86,1500 3459.06,1500 3532.68,1500.39 3702.76,1506.69 3777.95,1506.69 3851.57,1507.09 2877.17,1712.99 2953.54,1714.17 3026.38,1714.17 2877.17,1789.76 2952.36,1789.76 3025.98,1790.16 1413.78,1803.94 1485.83,1805.12 1562.99,1805.91 1413.78,1874.02 1490.94,1875.2 1563.39,1875.98
DC-ADC: C65.1 R82.1 U21.27 | length 1077.7
  Top w9.84: R82.1@1865.47,816.93 1932.28,816.93 C65.1@1934.25,814.96 ; v1(1934.25,763.39) C65.1@1934.25,814.96 ; C65.1@1935.04,815.75 C65.1@1934.25,814.96 ; U21.27@2261.02,1101.97 2261.02,1050.79 v1(2271.26,1040.55)
  Bottom w9.84: v1(1934.25,763.39) 1931.5,766.14 1802.76,766.14 1781.89,787.01 1781.89,917.32 1889.37,1024.8 2169.29,1024.8 2175.59,1031.1 2175.59,1066.93 2192.52,1083.86 2227.95,1083.86 v1(2271.26,1040.55)
FG: CN2.3 R36.2 | length 88.3
  Top w9.84: CN2.3@1355.51,679.92 1425.98,679.92 R36.2@1443.7,677.95
FG_CTL: R36.1 U21.20 ZD1.2 | length 1013
  Top w9.84: R36.1@1509.06,677.95 1510.63,679.53 v1(1744.09,679.53) ; U21.20@2140.94,1127.56 2143.7,1124.8 v1(2143.7,1053.15)
  Bottom w9.84: v1(1744.09,679.53) 1744.09,931.1 1866.14,1053.15 v1(2143.7,1053.15)